# Altium PCB smarchWatch_V5.PcbDoc
Units mm, origin at the board's own origin, x right, y up, seen from the top; angles counter-clockwise.
Board outline 33 x 30 mm, 4 copper layers (Top Layer, Signal Layer 1, Signal Layer 2, Bottom Layer), stack 0.82 mm thick; 54 components, 70 nets, 249 pads, 128 vias.
Unrouted connection lines stored in the file: 1.
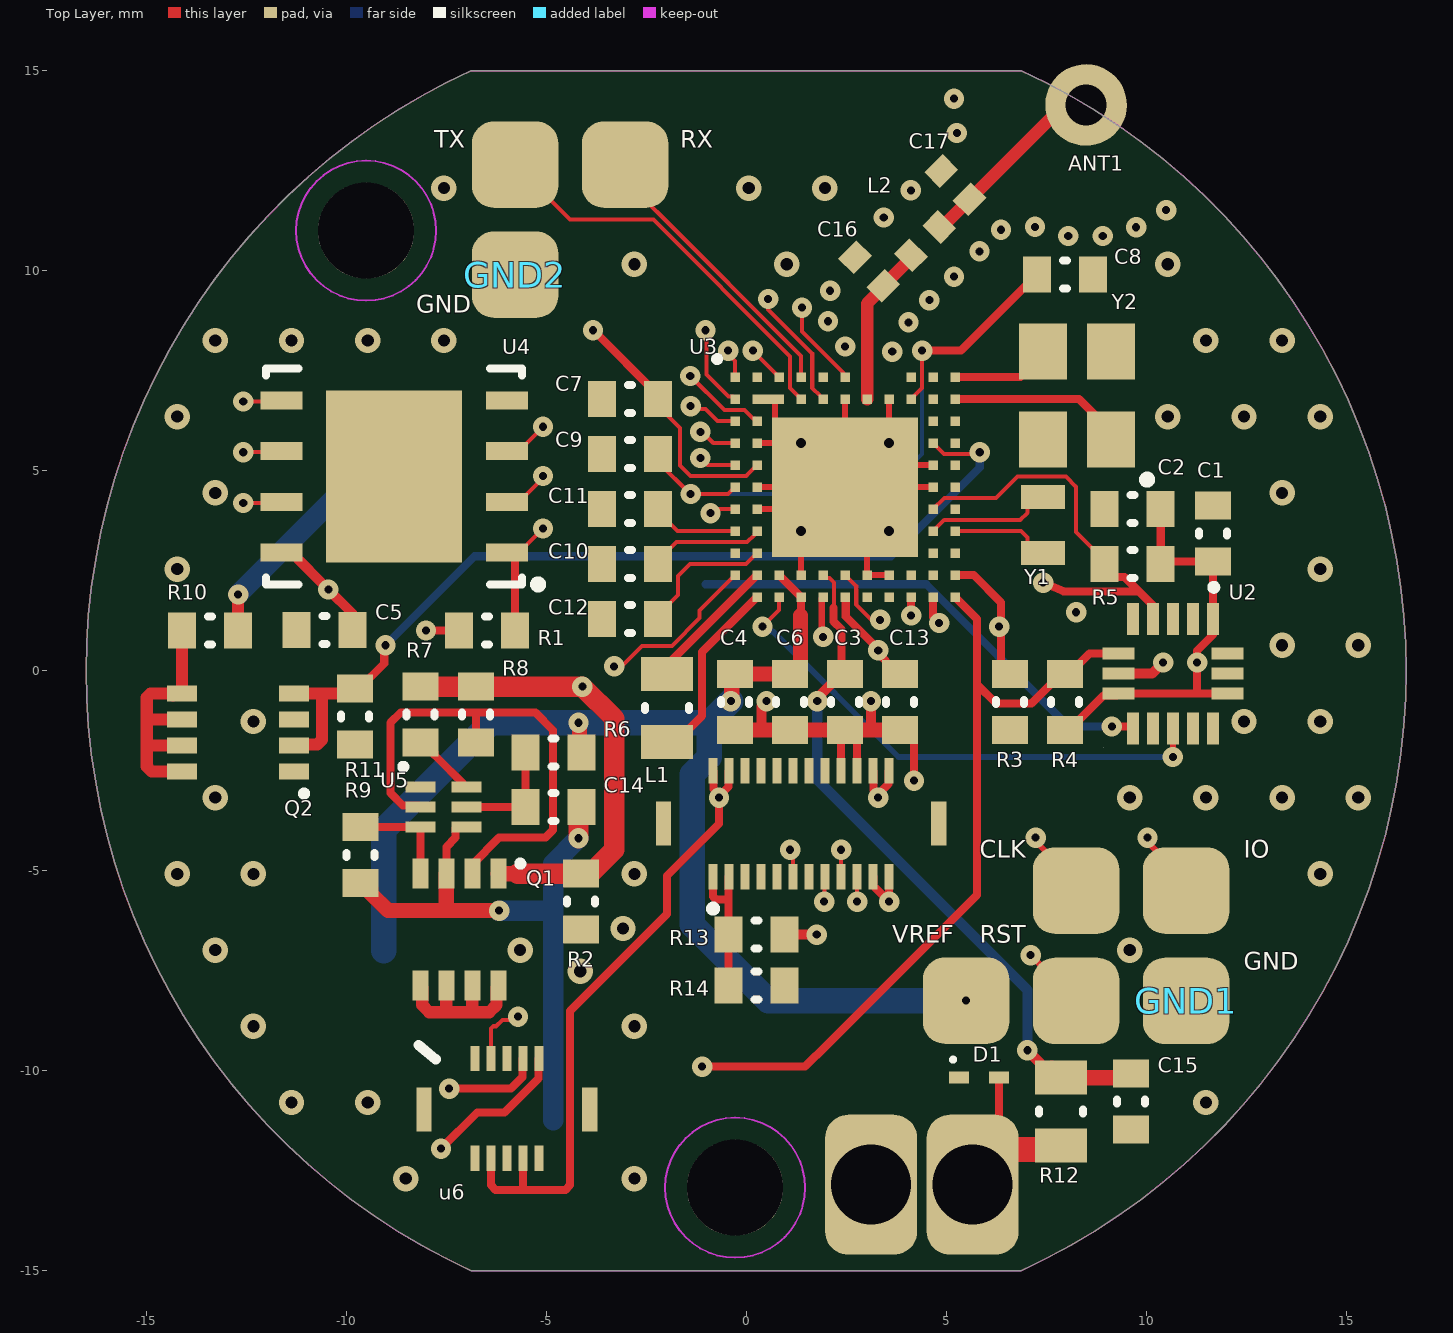
[diagram p0: Top Layer view]
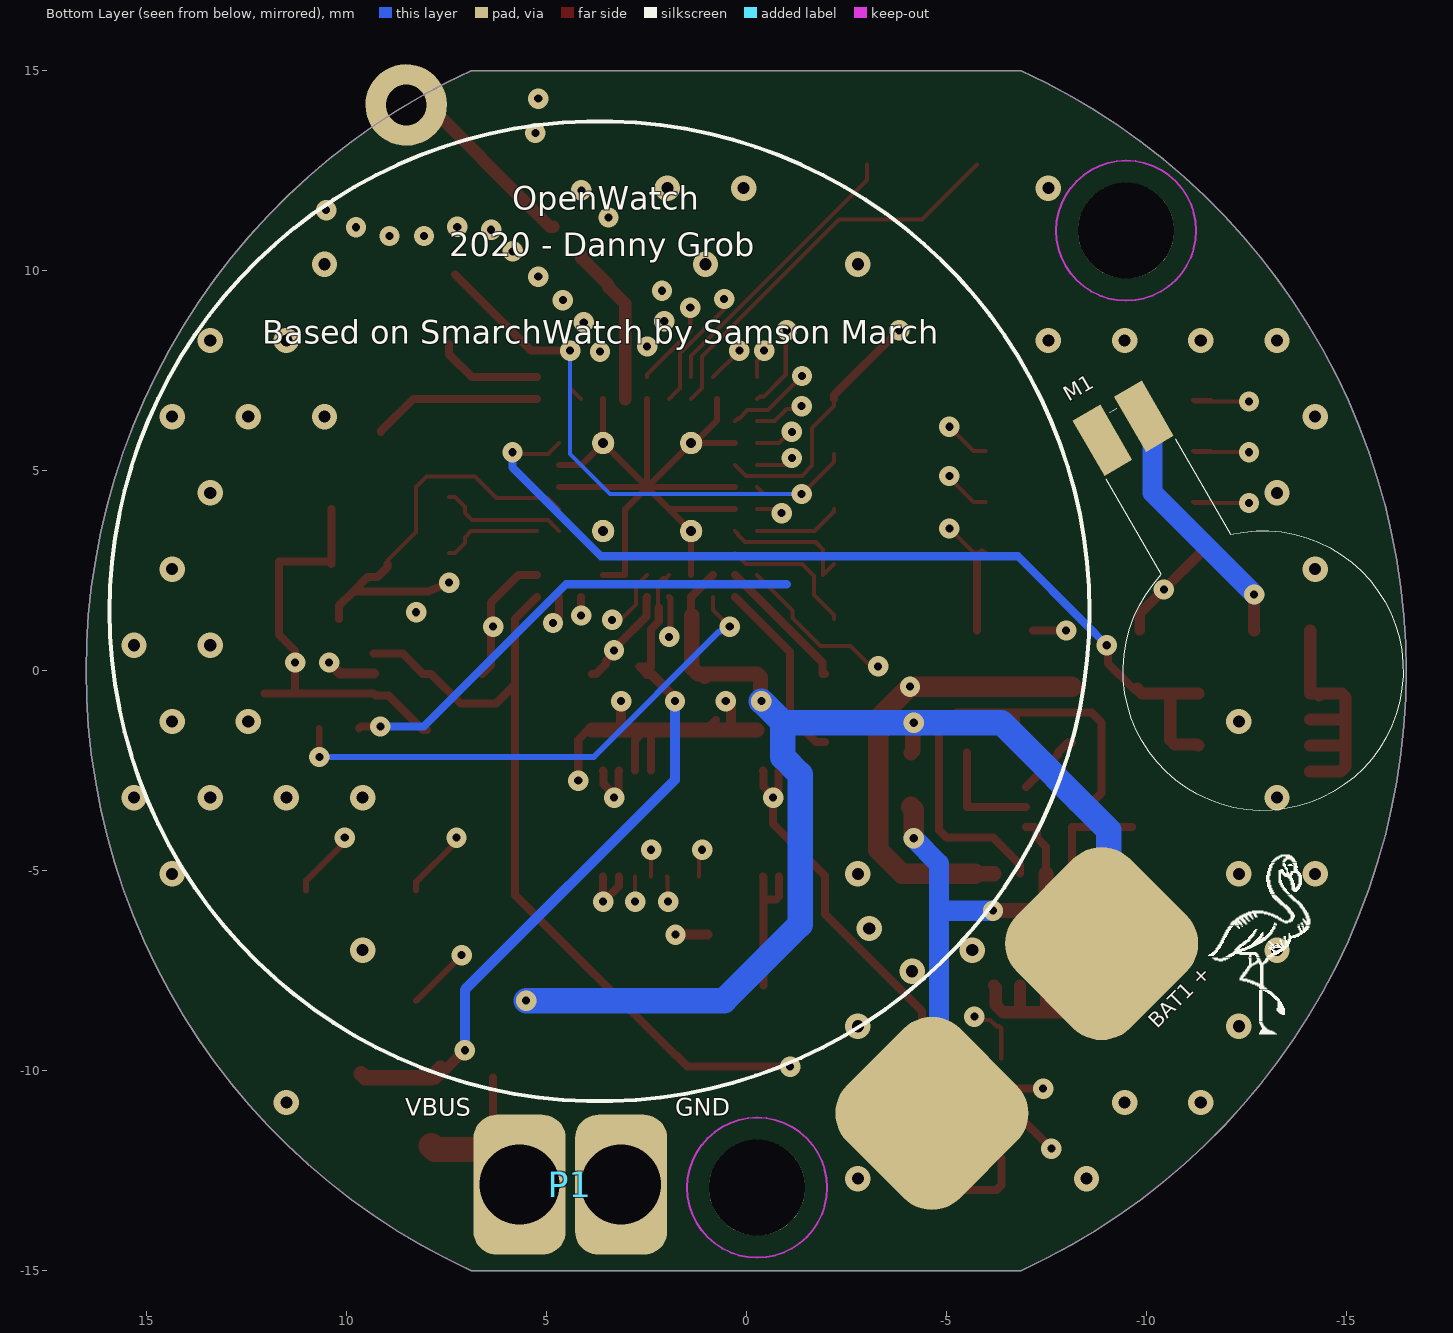
[diagram p1: Bottom Layer view, seen from below]
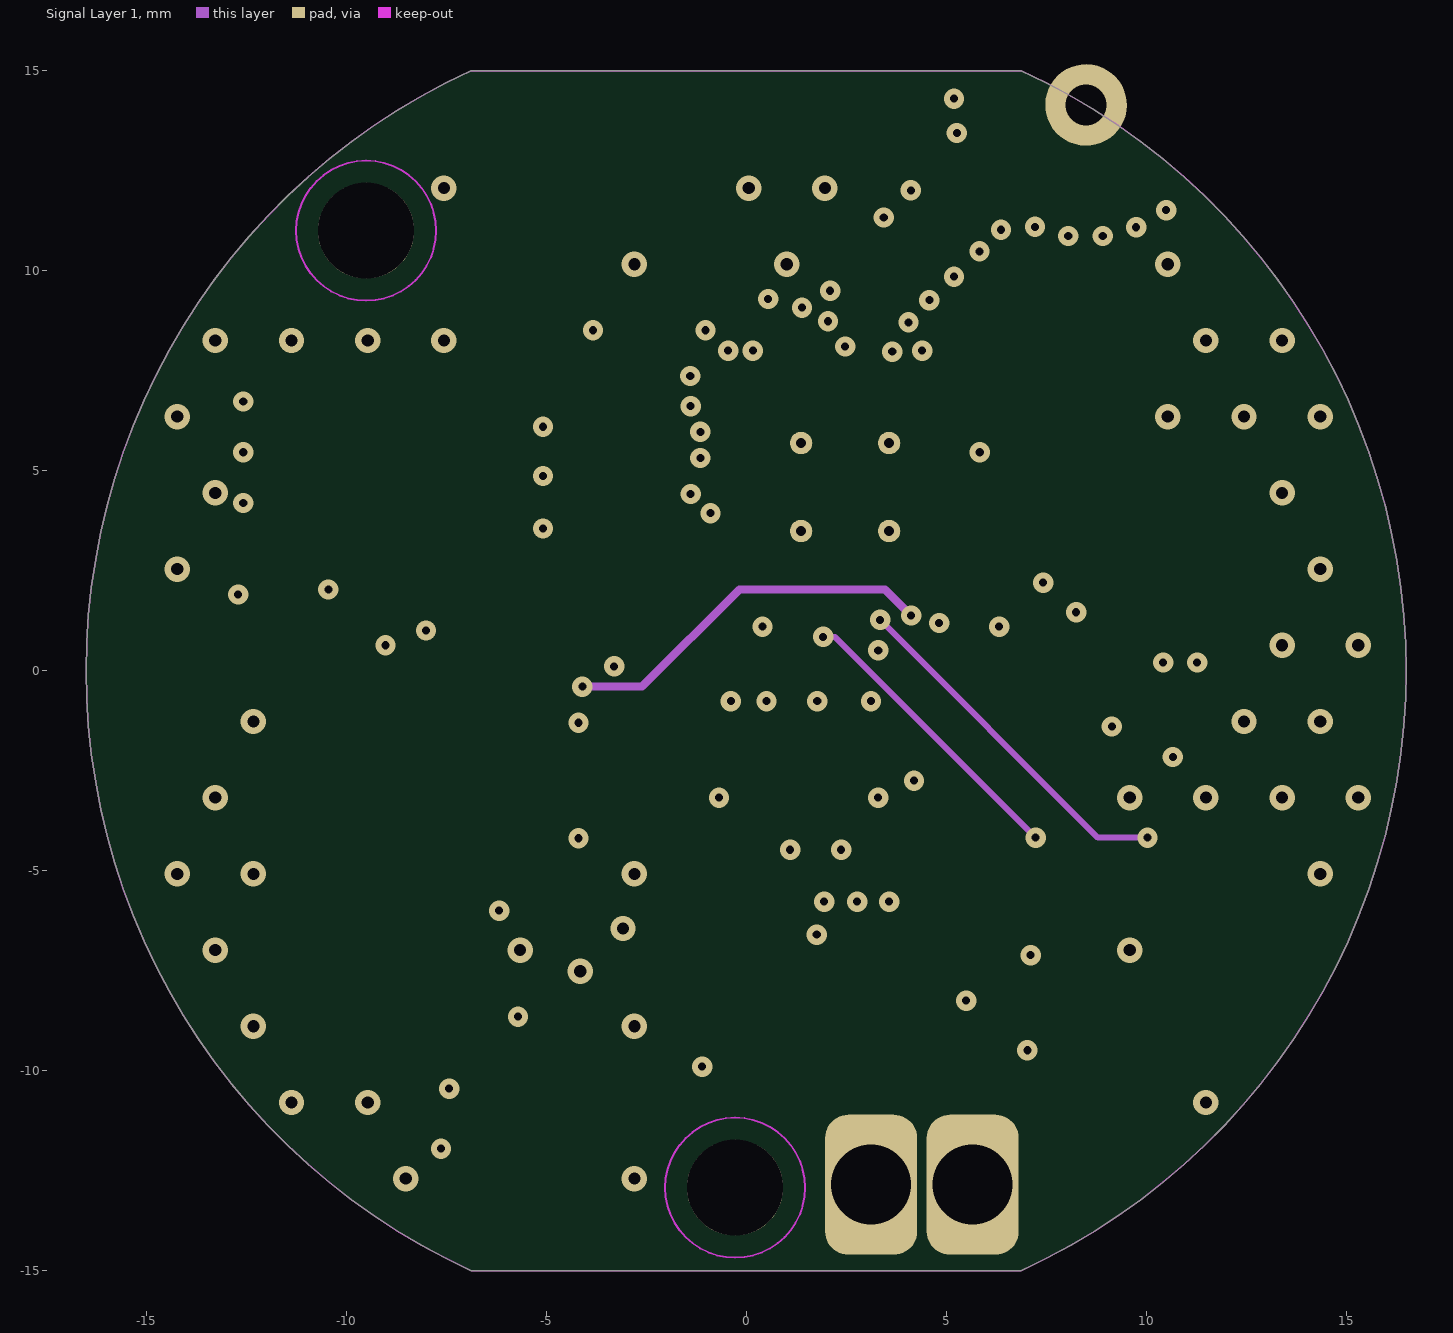
[diagram p2: Signal Layer 1]
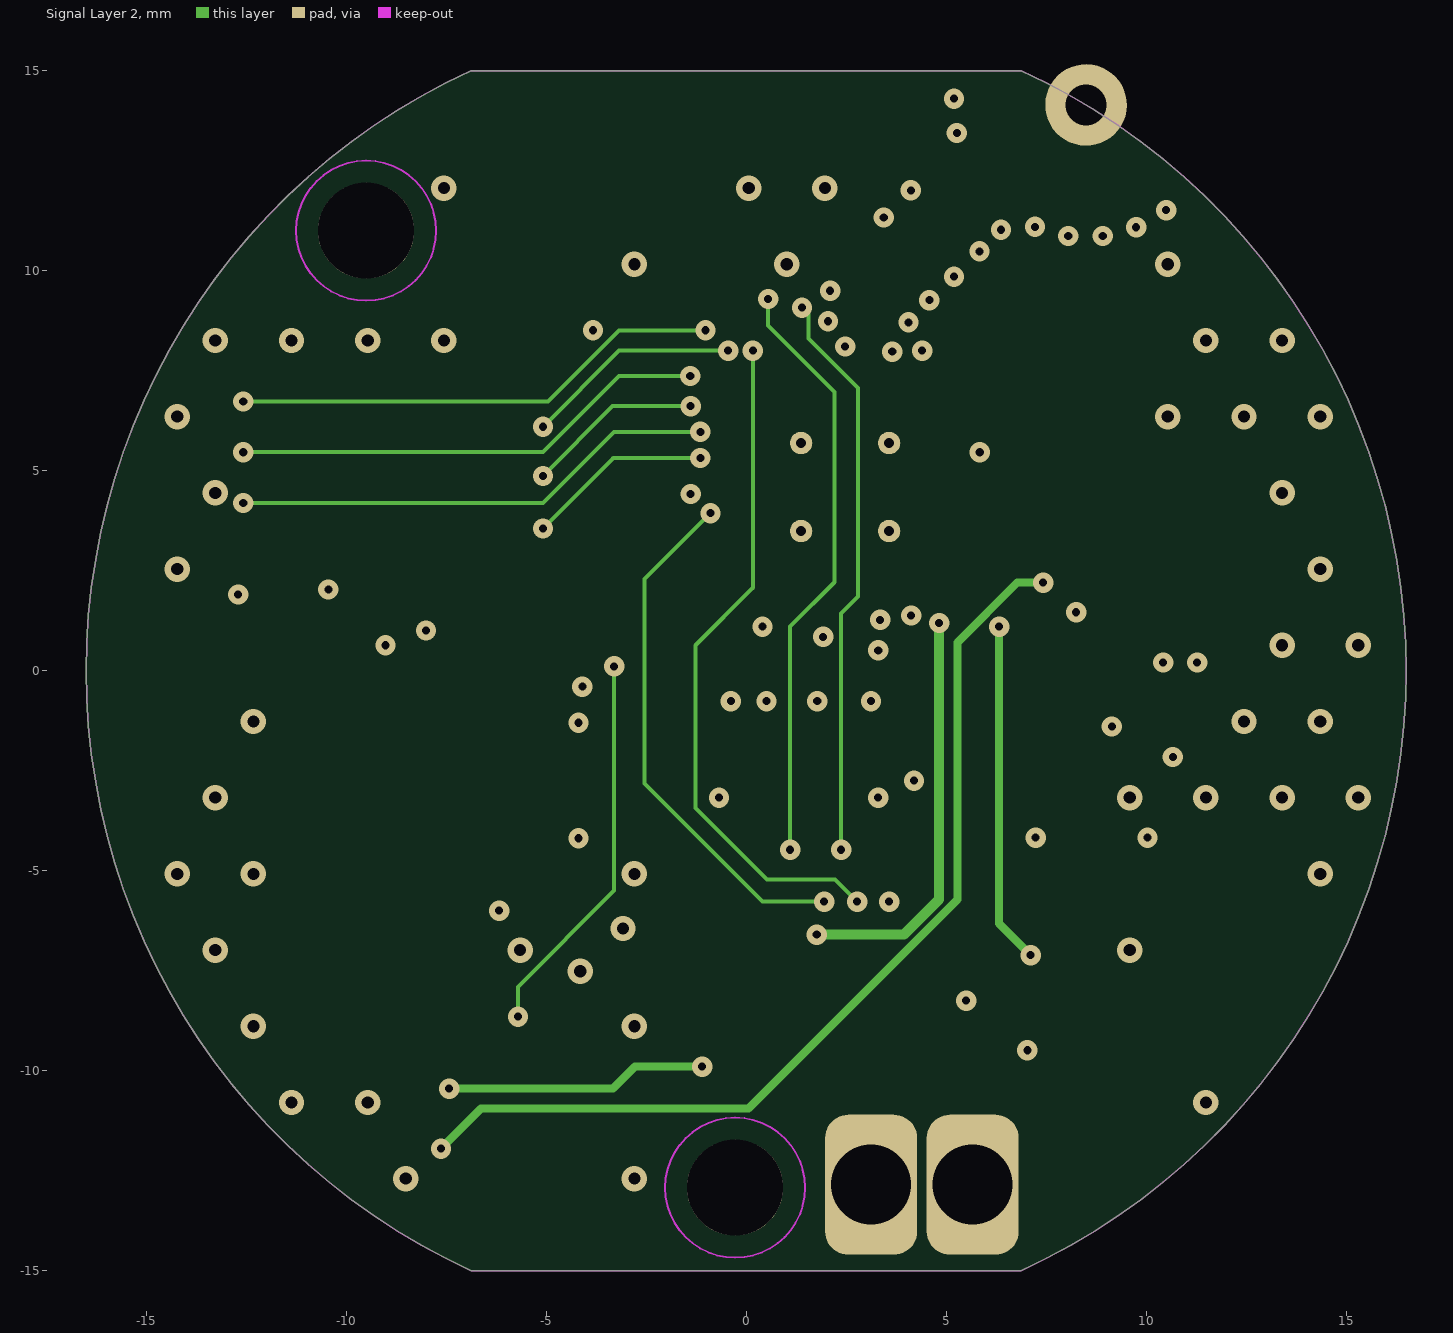
[diagram p3: Signal Layer 2]
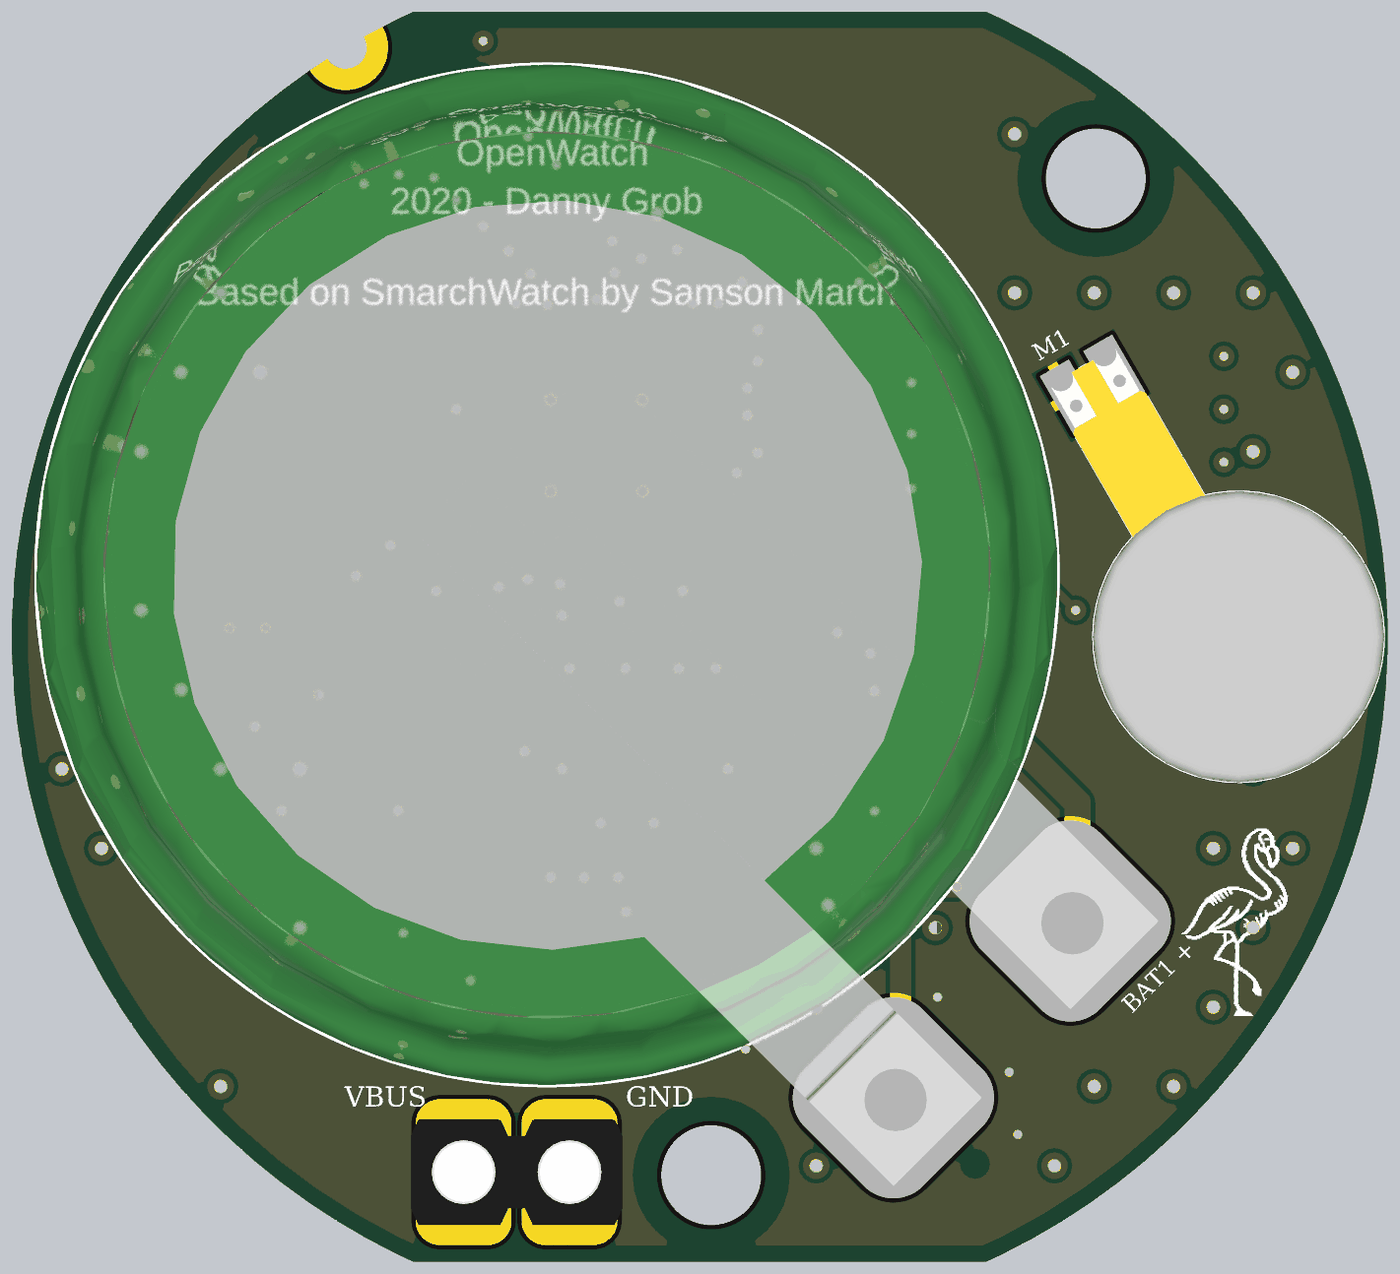
[diagram p4: 3D render of the assembled board from below, using the file's embedded part models]

## Layer stack, top to bottom
Top Solder: solder mask 0.01, Solder Resist, Dk 3.5
Top Layer: signal copper 0.035
Dielectric 1: core 0.175, FR-4, Dk 4.29
Signal Layer 1: signal copper 0.035
Dielectric 3: prepreg 0.33, Dk 3.96
Signal Layer 2: signal copper 0.035
Dielectric 2: core 0.175, Dk 4.29
Bottom Layer: signal copper 0.035
Bottom Solder: solder mask 0.01, Solder Resist, Dk 3.5

## Board outline
-6.875,-15 cw(c0,0) -6.875,15 6.875,15 cw(c0,0) 6.875,-15

## Design rules (kind name [scope] priority, off if disabled: settings)
BoardOutlineClearance BoardOutlineClearance_SILK [OnLayer('Bottom Overlay') or OnLayer('Top Overlay')] p1: gap=0 ignorepadtopadclearanceinfootprint=FALSE
BoardOutlineClearance BoardOutlineClearance_Castellated [(InComponent('CH_GND') OR InComponent('CH_VIN') OR InNet('5V')) OR InComponent('TX') OR InComponent('RX') OR (IsTrack AND InNet('TX')) OR (IsTrack AND InNet('RX')) OR InComponent('VBAT') OR InComponent('GND') OR (IsTrack AND InNet('VBAT')) OR InComponent('ANT1') OR (IsTrack AND InNet('ANT'))] p2: gap=0 ignorepadtopadclearanceinfootprint=FALSE
BoardOutlineClearance BoardOutlineClearance_TOUCH [InNamedPolygon('TOUCH_6') or  InNamedPolygon('TOUCH_7') or  InNamedPolygon('TOUCH_8') or  InNamedPolygon('TOUCH_8') or  InNamedPolygon('TOUCH_SOLDER_6') or  InNamedPolygon('TOUCH_SOLDER_7') or  InNamedPolygon('TOUCH_SOLDER_8') or  InNamedPolygon('TOUCH_SOLDER_8') or InComponent('CT_1') or  InComponent('CT_2') or   InComponent('CT_3') or   InComponent('CT_4')] p3: gap=0 ignorepadtopadclearanceinfootprint=FALSE
BoardOutlineClearance [All] p4: gap=0.381 ignorepadtopadclearanceinfootprint=FALSE
Clearance Clearance_Castellated [(InComponent('CH_GND') OR InComponent('CH_VIN') OR InNet('5V')) OR InComponent('TX') OR InComponent('RX') OR (IsTrack AND InNet('TX')) OR (IsTrack AND InNet('RX')) OR InComponent('VBAT') OR InComponent('GND') OR (IsTrack AND InNet('VBAT')) OR InComponent('ANT1') OR (IsTrack AND InNet('ANT')) vs IsKeepOut] p1: gap=0 ignorepadtopadclearanceinfootprint=FALSE
Clearance Clearance_ANT [InComponent('ANT1')] p2: gap=2 ignorepadtopadclearanceinfootprint=FALSE
Clearance [All] p3: gap=0.102 ignorepadtopadclearanceinfootprint=FALSE
ComponentClearance [All] p1: gap=0 collisioncheckmode=3 verticalgap=0 showdistances=FALSE
MinimumSolderMaskSliver [All] p1: minsoldermaskwidth=0
PolygonConnect PolygonConnect_CHARGE [InComponent('CH_GND') OR InComponent('CH_VIN') OR InComponent('GND')] p1: connectstyle=Direct reliefconductorwidth=0.254 reliefentries=4 polygonreliefangle="90 Angle" airgapwidth=0.254
PolygonConnect PolygonConnect_TOUCH [InNet('TOUCH_6') or InNet('TOUCH_7') or  InNet('TOUCH_8') or  InNet('TOUCH_9')] p2: connectstyle=Direct reliefconductorwidth=0.254 reliefentries=4 polygonreliefangle="90 Angle" airgapwidth=0.254
PolygonConnect PolygonConnect_VIA [IsVia] p3: connectstyle=Direct reliefconductorwidth=0.254 reliefentries=4 polygonreliefangle="90 Angle" airgapwidth=0.254
PolygonConnect [All] p4: connectstyle=Relief reliefconductorwidth=0.254 reliefentries=4 polygonreliefangle="90 Angle" airgapwidth=0.152
RoutingVias [All] p1: holewidth=0.711 width=1.27 viastyle="Through Hole" minholewidth=0.203 minwidth=0.508 maxholewidth=127 maxwidth=127
SilkToSilkClearance [All] p1: silktosilkclearance=0
SilkToSolderMaskClearance [IsPad] p1: minsilkscreentomaskgap=0 clearancetoexposedcopper=TRUE
SolderMaskExpansion [All] p1: expansion=0.102 istentingtop=FALSE
Width [All] p1: maxlimit=25.4 minlimit=0.102 preferedwidth=0.203
26 further rules are at their usual default settings.

## Classes and differential pairs
component class BLE: ANT1 C3 C4 C5 C6 C7 C8 C9 C10 C11 C12 C13 C16 C17 CLK GND1 GND2 IO L1 L2 R1 R2 R3 RST RX TX U3 U4 Y1 Y2
component class Actuators: M1 Q2 R10 R11 R13 R14 u6
component class Sensors: C1 C2 R4 R5 U2
component class Power: "BAT1 +" C14 C15 D1 P1 Q1 R6 R7 R8 R9 R12 U5

## Components (designator, comment, footprint, x,y, rotation, side; value= is the part's Value field where it differs from the comment)
ANT1 "0.1\" Header" "0.1\" Header" 8.498,14.143 r59 top
"BAT1 +" "RJD2430C1ST1" RJD2430C1ST1 3.664,1.485 r315 bottom (schematic designator BAT1)
C1 "100nF" CAP_0603_HIGH 11.675,3.425 r90 top
C2 "10uF" CAP_0603_HIGH 9.665,4.04 r180 top
C3 "4.7uF" CAP_0603_HIGH 2.475,-0.785 r270 top
C4 "1uF" CAP_0603_HIGH -0.275,-0.785 r270 top
C5 "100nF" CAP_0603_HIGH -10.541,1.016 r180 top
C6 "1uF" CAP_0603_HIGH 1.1,-0.785 r270 top
C7 "1uF" CAP_0603_HIGH -2.9,6.79 r180 top
C8 "4.7uF" CAP_0603_HIGH 7.975,9.9 r0 top
C9 "4.7uF" CAP_0603_HIGH -2.9,5.415 r180 top
C10 "10uF" CAP_0603_HIGH -2.9,2.665 r180 top
C11 "10uF" CAP_0603_HIGH -2.9,4.04 r180 top
C12 "10uF" CAP_0603_HIGH -2.9,1.29 r180 top
C13 "4.7uF" CAP_0603_HIGH 3.85,-0.785 r270 top
C14 "100nF" CAP_0603_HIGH -4.82,-3.405 r0 top
C15 "10uF" CAP_0603_HIGH 9.625,-10.775 r270 top
C16 "C" CAP_0402_MEDIUM 3.075,9.979 r315 top
C17 "C" CAP_0402_MEDIUM 5.233,12.136 r315 top
CLK "0.1\" Pad" "0.1\" Pad" 8.25,-5.5 r0 top
D1 "ESD9B5.0ST5G" ESD9B5.0ST5G 5.823,-10.175 r0 top
GND1 "0.1\" Pad" "0.1\" Pad" 11,-8.255 r0 top
GND2 "0.1\" Pad" "0.1\" Pad" -5.775,9.9 r0 top
IO "0.1\" Pad" "0.1\" Pad" 11,-5.5 r0 top
L1 "CKP2012NR47M-T" IND_0805_HIGH -1.975,-0.935 r270 top value=470nF
L2 "L" IND_0402_MEDIUM 4.473,10.739 r225 top
M1 "C0720B001F" C0720B001F -12.925,0 r150 bottom
P1 "800-10-002-30-507101" 800-10-002-30-507101 4.394,-12.852 r180 bottom
Q1 "ECH8693R-TL-W" ECH8693R-TL-W -7.17,-6.475 r270 top
Q2 "ECH8693R-TL-W" ECH8693R-TL-W -12.703,-1.55 r180 top
R1 "10K" RES_0603_HIGH -6.475,1.005 r180 top
R2 "0.1Ohm" RES_0603_HIGH -4.125,-5.775 r90 top
R3 "10K" RES_0603_HIGH 6.6,-0.785 r90 top
R4 "10K" RES_0603_HIGH 7.975,-0.785 r270 top
R5 "10K" RES_0603_HIGH 9.665,2.665 r0 top
R6 "330" RES_0603_HIGH -4.82,-2.05 r180 top
R7 "2.2K" RES_0603_HIGH -8.145,-1.1 r90 top
R8 "5.1M" RES_0603_HIGH -6.75,-1.1 r90 top
R9 "5.1M" RES_0603_HIGH -9.645,-4.605 r90 top
R10 "330" RES_0603_HIGH -13.403,1.005 r0 top
R11 "10K" RES_0603_HIGH -9.779,-1.151 r90 top
R12 "0.39 Ohm" RES_0805_HIGH 7.875,-11.025 r90 top
R13 "0 Ohm" RES_0603_HIGH 0.263,-6.6 r180 top
R14 "0 Ohm" RES_0603_HIGH 0.263,-7.875 r0 top
RST "0.1\" Pad" "0.1\" Pad" 8.25,-8.255 r0 top
RX "0.1\" Pad" "0.1\" Pad" -3.025,12.65 r0 top
TX "0.1\" Pad" "0.1\" Pad" -5.775,12.65 r0 top
U2 "LIS3DH" LIS3DH 10.675,-0.075 r270 top
U3 "DA14683" DA14683 2.475,4.59 r0 top
U4 "W25Q128JVPIQ" W25Q128JVPIQ -8.8,4.855 r180 top
U5 "BQ29700DSER" BQ29700DSER -7.57,-3.405 r0 top
u6 "DF37NB-10DS-0.4V" DF37NB-10DS-0.4V -5.98,-11.875 r0 top (schematic designator X?)
Y1 "9HT11-32.768KDZB-T" 9HT11-32.768KDZB-T 7.425,2.94 r90 top
Y2 "7M-16.000MEEQ-T" 7M-16.000MEEQ-T 9.125,5.775 r90 top

## Footprints (in the part's own frame and the unit in brackets; to place one, negate y for a bottom-side part, rotate by r counter-clockwise, add the part's x,y. Pads: shape width x height; smd on the part's side, far side on the other; paste and mask are expansions set on the pad)
"0.1\" Header" [mm] "0.1\" Header"
  round 2.04 hole 1.02: 1(0,0)
"0.1\" Pad" [mil] "0.1\" Pad"
  rrect50% 85x85 smd paste-85: 1(0,0)
7M-16.000MEEQ-T [mm] "16MHz ±10ppm Crystal 10pF 80 Ohms 4-SMD, No Lead"
  rect 1.4x1.2 smd: 1(0,0) 2(2.2,0) 3(2.2,1.7) 4(0,1.7)
  silkscreen extent -1.1,-1 -0.9,-0.8, body extent -0.7,-0.4 2.9,2.1, height 0.7
9HT11-32.768KDZB-T [mm] "32.768kHz ±20ppm Crystal 6pF 90 kOhms 2-SMD, No Lead"
  rect 0.6x1.1 smd: 1(0,0) 2(1.4,0)
  body extent -0.3,-0.6 1.7,0.6, height 0.6
800-10-002-30-507101 [mm] "2 Position Spring Mating Target Connector Surface Mount"
  rrect50% 2.3x3.5 hole 2: 1(-1.27,0) 2(1.27,0)
  body extent -2.54,-1.27 2.54,1.27, height 4
BQ29700DSER [mm] "Battery Battery Protection IC Lithium-Ion/Polymer 6-WSON (1.5x1.5)"
  rect 0.75x0.28 smd: 1(-0.575,0.5) 2(-0.575,0) 3(-0.575,-0.5) 4(0.575,-0.5) 5(0.575,0) 6(0.575,0.5)
  silkscreen extent -1.05,0.95 -0.95,1.05, body extent -0.78,-0.77 0.78,0.77, height 0.8
C0720B001F [mm] "DC Motor Vibration, ERM 10000 RPM  3VDC"
  rect 0.8x1.6 smd: 1(-0.6,7) 2(0.6,7)
  silkscreen extent -3.5,-3.5 3.5,7.5, body extent -3.5,-3.5 3.5,7.5, height 2.1
CAP_0402_MEDIUM [mm] "Medium density 0402 passive"
  rect 0.55x0.65 smd: 1(-0.5,0) 2(0.5,0)
  body extent -0.52,-0.27 0.53,0.28, height 0.4
CAP_0603_HIGH [mm] "High density 0603 passive"
  rect 0.7x0.9 smd: 1(-0.7,0) 2(0.7,0)
  silkscreen extent -0.05,-0.35 0.05,0.35, body extent -0.85,-0.47 0.85,0.47, height 0.6
DA14683 [mm] "SmartBond DA14683 Single-chip high-security Bluetooth 5 solution with expandable memory"
  rect 0.24x0.24 smd paste-0.025: A1(-2.75,2.75) A2(-2.75,2.2) A3(-2.75,1.65) A4(-2.75,1.1) A5(-2.75,0.55) A6(-2.75,0) A7(-2.75,-0.55) A8(-2.75,-1.1) A9(-2.75,-1.65) A10(-2.75,-2.2) A11(-2.2,-2.75) A12(-1.65,-2.75) A13(-1.1,-2.75) A14(-0.55,-2.75) A15(0,-2.75) A16(0.55,-2.75) A17(1.1,-2.75) A18(1.65,-2.75) A19(2.2,-2.75) A20(2.75,-2.75) A21(2.75,-2.2) A22(2.75,-1.65) A23(2.75,-1.1) A24(2.75,-0.55) A25(2.75,0) A26(2.75,0.55) A27(2.75,1.1) A28(2.75,1.65) A29(2.75,2.2) A30(2.75,2.75) A31(2.2,2.75) A32(1.65,2.75) A33(0,2.75) A34(-0.55,2.75) A35(-1.1,2.75) A36(-1.65,2.75) A37(-2.2,2.75) B1(-2.2,1.65) B2(-2.2,0.55) B3(-2.2,-1.1) B4(-2.2,-1.65) B5(-2.2,-2.2) B6(-1.65,-2.2) B7(-0.55,-2.2) B8(0,-2.2) B9(1.1,-2.2) B10(1.65,-2.2) B11(2.2,-2.2) B12(2.2,-1.65) B13(2.2,-1.1) B14(2.2,-0.55) B15(2.2,1.1) B16(2.2,1.65) B17(2.2,2.2) B18(1.65,2.2) B19(1.1,2.2) B20(0.55,2.2) B21(0,2.2) B22(-0.55,2.2) B23(-1.1,2.2) GND(-2.2,-0.55) GND(-2.2,0) GND(-2.2,1.1) GND(-1.1,-2.2) GND(0.55,-2.2) GND(2.2,0) GND(2.2,0.55)
  rect 0.79x0.24 smd paste-0.025: GND(-1.925,2.2)
  round 0.559 hole 0.254 mask+0.102: GND(-1.1,-1.1) GND(-1.1,1.1) GND(1.1,-1.1) GND(1.1,1.1)
  rect 3.65x3.485 smd paste-1 mask+0: GND(0,0)
  silkscreen extent -3.27,3.13 -3.13,3.27, body extent -3,-3 3,3, height 0.85
DF37NB-10DS-0.4V [mm]
  rect 0.23x0.63 smd: 1(-0.8,2.177) 2(-0.4,2.177) 3(0,2.177) 4(0.4,2.177) 5(0.8,2.177) 6(0.8,-0.315) 7(0.4,-0.315) 8(0,-0.315) 9(-0.4,-0.315) 10(-0.8,-0.315)
  rect 0.38x1.1 smd: MNT(-2.07,0.904) MNT(2.07,0.904)
  silkscreen extent -2.21,2.16 -1.78,2.51, body extent -2.11,-0.58 2.11,2.4, height 2.71
ECH8693R-TL-W [mm] "Mosfet Array 2 N-Channel (Dual) Common Drain 24V 14A 1.4W Surface Mount SOT-28FL/ECH8"
  rect 0.75x0.4 smd: 1(-1.4,0.975) 2(-1.4,0.325) 3(-1.4,-0.325) 4(-1.4,-0.975) 5(1.4,-0.975) 6(1.4,-0.325) 7(1.4,0.325) 8(1.4,0.975)
  silkscreen extent -1.7,1.47 -1.6,1.57, body extent -1.18,-1.48 1.18,1.48, height 0.95
ESD9B5.0ST5G [mm] "TVS DIODE 5V SOD923"
  rect 0.5x0.3 smd: 1(-0.5,0) 2(0.5,0)
  silkscreen extent -0.7,0.4 -0.6,0.5, body extent -0.5,-0.33 0.5,0.33, height 0.4
IND_0402_MEDIUM [mm] "Medium density 0402 passive"
  rect 0.55x0.65 smd: 1(-0.5,0) 2(0.5,0)
  body extent -0.52,-0.27 0.53,0.28, height 0.4
IND_0805_HIGH [mm] "High density 0805 passive"
  rect 0.85x1.3 smd: 1(-0.85,0) 2(0.85,0)
  silkscreen extent -0.05,-0.55 0.05,0.55, body extent -1.1,-0.67 1.1,0.68, height 0.7
LIS3DH [mm] "LIS3DH Accelerometer X, Y, Z Axis ±2g, 4g, 8g, 16g 0.5Hz ~ 625Hz 16-LGA (3x3)"
  rect 0.8x0.3 smd: 1(-1.365,1) 2(-1.365,0.5) 3(-1.365,0) 4(-1.365,-0.5) 5(-1.365,-1) 9(1.365,-1) 10(1.365,-0.5) 11(1.365,0) 12(1.365,0.5) 13(1.365,1)
  rect 0.3x0.8 smd: 6(-0.5,-1.365) 7(0,-1.365) 8(0.5,-1.365) 14(0.5,1.365) 15(0,1.365) 16(-0.5,1.365)
  silkscreen extent -2.23,0.94 -2.08,1.09, body extent -1.5,-1.5 1.5,1.5, height 1
RES_0603_HIGH [mm] "High density 0603 passive"
  rect 0.7x0.9 smd: 1(-0.7,0) 2(0.7,0)
  silkscreen extent -0.05,-0.35 0.05,0.35, body extent -0.85,-0.47 0.85,0.47, height 0.6
RES_0805_HIGH [mm] "High density 0805 passive"
  rect 0.85x1.3 smd: 1(-0.85,0) 2(0.85,0)
  silkscreen extent -0.05,-0.55 0.05,0.55, body extent -1.1,-0.67 1.1,0.68, height 0.7
RJD2430C1ST1 [mm] "Coin, 24.5mm 3.7V Lithium-Ion Battery Rechargeable (Secondary) 110mAh"
  rrect50% 4x4 smd: 1(-3,14.75) 2(3,14.75)
  silkscreen extent -12.25,-12.25 12.25,12.25, body extent -12.25,-12.25 12.25,16.25, height 3.35
W25Q128JVPIQ [mm] "FLASH - NOR Memory IC 128Mb (16M x 8) SPI - Quad I/O, QPI, DTR 133MHz 8-WSON (6x5)"
  rect 1.05x0.45 smd: 1(-2.82,1.905) 2(-2.82,0.635) 3(-2.82,-0.635) 4(-2.82,-1.905) 5(2.82,-1.905) 6(2.82,-0.635) 7(2.82,0.635) 8(2.82,1.905)
  rect 3.4x4.3 smd paste-1.7: 4(0,0)
  silkscreen extent -3.7,-2.7 3.2,2.8, body extent -3.05,-2.55 3.05,2.55, height 0.8

## Part data
"BAT1 +": "Coin, 24.5mm 3.7V Lithium-Ion Battery Rechargeable (Secondary) 110mAh"
C1 C2 C3 C4 C5 C6 C7 C8 C9 C10 C11 C12 C13 C14 C15: library part Capacitor_0603, "0603 Capacitor"
C16 C17: library part Capacitor_0402, "0402 Capacitor"
D1: "TVS DIODE 5V SOD923"
L1: library part Inductor_0805, "Inductor_0805", Parameter 1=CKP2012, Parameter 2=NR47M-T
L2: library part Inductor_0402, "Inductor_0402"
M1: "DC Motor Vibration, ERM 10000 RPM 3VDC"
P1: "2 Position Spring Mating Target Connector Surface Mount"
Q1 Q2: "Mosfet Array 2 N-Channel (Dual) Common Drain 24V 14A 1.4W Surface Mount SOT-28FL/ECH8"
R1 R2 R3 R4 R5 R6 R7 R8 R9 R10 R11 R13 R14: library part Resistor_0603, "0603 Resistor"
R12: library part Resistor_0805, "0805 Resistor"
U2: "LIS3DH ACCEL 2-16G I2C/SPI 16LGA"
U3: "SmartBond DA14683 Single-chip high-security Bluetooth 5 solution with expandable memory"
U4: "FLASH - NOR Memory IC 128Mb (16M x 8) SPI - Quad I/O, QPI, DTR 133MHz  8-WSON (6x5)"
U5: "Battery Battery Protection IC Lithium-Ion/Polymer 6-WSON (1.5x1.5)"
Y1: "32.768kHz ±20ppm Crystal 6pF 90 kOhms 2-SMD, No Lead", Parameter 1=9HT11, Parameter 2=-32.76, Parameter 3=8KDZ, Parameter 4=B-T
Y2: "16MHz ±10ppm Crystal 10pF 80 Ohms 4-SMD, No Lead", Parameter 1=7M-16, Parameter 2=.000M, Parameter 3=EEQ-T

## Free pads (board coordinates)
  round 2.4 hole 2.4 unplated: 0(-9.5,11) 0(-0.275,-12.925)
  rect 0.38x1.1 smd: 0(-2.065,-3.825) 0(4.815,-3.825)
  rect 0.23x0.63 smd: 1(-0.825,-5.15) 2(-0.425,-5.15) 3(-0.025,-5.15) 4(0.375,-5.15) 5(0.775,-5.15) 6(1.175,-5.15) 7(1.575,-5.15) 8(1.975,-5.15) 9(2.375,-5.15) 10(2.775,-5.15) 11(3.175,-5.15) 12(3.575,-5.15) 13(3.575,-2.5) 14(3.175,-2.5) 15(2.775,-2.5) 16(2.375,-2.5) 17(1.975,-2.5) 18(1.575,-2.5) 19(1.175,-2.5) 20(0.775,-2.5) 21(0.375,-2.5) 22(-0.025,-2.5) 23(-0.425,-2.5) 24(-0.825,-2.5)
  rrect50% 2.159x2.159 smd: 2(5.5,-8.25)

## Via types
v1: diameter 0.508, hole 0.203, Top Layer to Bottom Layer, tented both sides, 82 vias
v2: diameter 0.635, hole 0.305, Top Layer to Bottom Layer, tented both sides, 46 vias

## Nets (pads, with @x,y where several pads share a name; then routed paths per layer and width w, separated by ;. In a path a pad name is that pad's centre, name@x,y a point inside that pad or via, vN(x,y) a via of type N, cw(c..) or ccw(c..) an arc to the next point about the centre after c; other vN are vias at no path point)
1V2: C10.1 U3.B3 | length 3.4
  Top Layer w0.102: C10.1 -1.925,2.39 -1.925,3.028 -1.741,3.212 0.023,3.212 0.206,3.395 0.206,3.421 U3.B3
1V4: C8.1 C9.1 U3.A6 U3.B18 | length 16.3
  Top Layer w0.102: C9.1 -2.2,5.219 -1.397,4.416 v1(-1.387,4.416) -0.449,4.416 U3.A6 ; U3.B18 4.4,7.065 v1(4.4,8.001)
  Top Layer w0.203: v1(4.4,8.001) 5.376,8.001 C8.1
  Bottom Layer w0.102: v1(-1.387,4.416) 3.4,4.416 4.4,5.416 v1(4.4,8.001)
1V8: C11.1 U3.A8 | length 2.2
  Top Layer w0.102: C11.1 -2.2,3.978 -1.712,3.49 U3.A8
1V8P: C12.1 U3.B4 | length 3.5
  Top Layer w0.102: C12.1 -2.2,1.39 -1.698,1.892 -1.698,2.366 -1.399,2.665 0,2.665 U3.B4
3V3: C1.1 C2.1 C5.1 C7.1 C13.1 M1.1 pad.11 pad.12 pad.13 pad.14 pad.23 pad.24 R1.2 R4.2 R5.2 U2.1 U2.8 U2.14 U3.A15 U3.B2 U4.8 u6.7 u6.9 | length 42.1
  Top Layer w0.102: C7.1 -2.2,6.612 -1.65,6.062 -1.65,5.125 -1.393,4.868 0.003,4.868 U3.B2
  Top Layer w0.203: v1(-8.001,1.005) R1.2 ; u6.9 -6.38,-12.862 -6.261,-12.981 -5.58,-12.981 ; u6.7 -5.58,-12.981 ; v1(-3.826,8.509) -3.819,8.509 -2.2,6.89 C7.1 ; pad.24 -0.812,-2.513 -0.812,-2.957 ; pad.23 -0.438,-2.513 -0.438,-2.904 -0.676,-3.141 v1(-0.676,-3.175) -0.676,-3.828 -1.975,-5.127 -1.975,-6.08 -4.4,-8.505 -4.4,-12.862 -4.519,-12.981 -5.58,-12.981 ; U3.A15 2.49,1.825 2.49,1.358 v1@3.162,0.685 ; pad.11 3.18,-5.155 3.18,-5.38 v1(3.575,-5.775) pad.12 ; pad.14 3.188,-2.513 3.188,-2.981 3.3,-3.093 3.562,-2.831 3.562,-2.513 pad.13 ; v1@3.302,0.545 v1(3.302,0.508) 3.302,0.436 3.502,0.237 3.502,0.163 3.75,-0.085 C13.1 ; R4.2 8.075,-1.485 8.937,-0.623 9.262,-0.623 U2.8 11.275,-0.575 ; C2.1 R5.2 10.425,2.725 C1.1 U2.1 11.675,0.897 11.275,0.497 v1(11.275,0.202) 11.275,-0.575 ; U2.14 11.275,-0.575
  Top Layer w0.254: U4.8 -11.363,2.95 v1(-10.443,2.03) -9.841,1.428 C5.1 C5.1@-9.841,1.005
  Bottom Layer w0.508: M1.1@-9.064,5.603 M1.1
  other v1: 3.3,-3.175
16M_N: U3.A30 Y2.3 | length 2.7
  Top Layer w0.203: U3.A30 6.857,7.34 7.425,7.908 Y2.3 Y2.3@7.425,8.165
16M_P: U3.A29 Y2.1 | length 4.3
  Top Layer w0.203: U3.A29 8.323,6.79 9.125,5.988 Y2.1@9.125,5.965
32K_N: U3.B13 Y1.2 | length 3.2
  Top Layer w0.102: U3.B13 4.953,3.768 6.853,3.768 7.032,3.947 7.032,4.091 7.281,4.34 Y1.2
32K_P: U3.A23 Y1.1 | length 2.5
  Top Layer w0.102: U3.A23 6.875,3.49 7.032,3.333 7.032,3.189 7.281,2.94 Y1.1
ANT: ANT1.1 C17.2 L2.1 | length 4.8
  Top Layer w0.312: L2.1 4.897,11.093 C17.2 7.617,13.813 8.21,13.813 ANT1.1@8.383,13.986
B_GND: "BAT1 +.2" C14.2 Q1.3 R9.1 U5.4 | length 15.7
  Top Layer w0.203: Q1.3 -7.495,-4.405 -7.265,-4.175 -7.265,-3.943 -7.226,-3.905 U5.4
  Top Layer w0.381: R9.1 -9.545,-5.305 -9.385,-5.465 -9.385,-5.565 -8.954,-5.996 -7.495,-5.996 ; Q1.3 -7.495,-5.996 ; v1(-6.174,-6) -6.178,-5.996 -7.495,-5.996
  Top Layer w0.508: v1(-4.191,-4.191) -4.191,-3.476 C14.2
  Bottom Layer w0.508: v1(-6.174,-6) -4.822,-6 ; -4.822,-11.243 -4.822,-6 ; v1(-4.191,-4.191) -4.822,-4.822 -4.822,-6
BAT: C14.1 R6.2 U5.5 | length 2.8
  Top Layer w0.203: U5.5 C14.1 R6.2
COUT: Q1.2 R8.1 U5.2 | length 12.9
  Top Layer w0.203: U5.2 -8.183,-3.367 -8.583,-3.367 -8.888,-3.062 -8.888,-1.301 -8.634,-1.047 -6.729,-1.047 ; Q1.2 -6.845,-4.846 -6.174,-4.175 -5.011,-4.175 -4.824,-3.988 -4.824,-1.49 -5.267,-1.047 -6.729,-1.047 ; R8.1 -6.75,-1.068 -6.729,-1.047
DISPLAY_BCKL: R13.1 U3.A19 | length 11.8
  Top Layer w0.203: U3.A19 4.675,1.341 v1(4.826,1.19)
  Top Layer w0.254: R13.1 v1(1.766,-6.6)
  Signal Layer 2 w0.254: v1(1.766,-6.6) 3.941,-6.6 4.826,-5.715 v1(4.826,1.19)
DISPLAY_CLK: pad.8 U3.A7 | length 14.4
  Top Layer w0.102: v1(-0.889,3.937) -0.779,3.937 -0.676,4.04 U3.A7 ; v1(1.95,-5.775) 1.963,-5.763 1.963,-5.162 pad.8
  Signal Layer 2 w0.102: v1(-0.889,3.937) -2.54,2.286 -2.54,-2.825 0.41,-5.775 v1(1.95,-5.775)
DISPLAY_CS: pad.9 U3.A33 | length 17.2
  Top Layer w0.102: v1(1.397,9.075) 1.397,8.483 2.475,7.405 U3.A33 ; pad.9 v1(2.375,-4.476)
  Signal Layer 2 w0.102: v1(1.397,9.075) 1.562,8.91 1.562,8.3 2.8,7.062 2.8,1.857 2.375,1.432 v1(2.375,-4.476)
DISPLAY_MISO: U3.A37
DISPLAY_MOSI: pad.6 U3.B22 | length 18.7
  Top Layer w0.102: v1(0.55,9.289) 0.55,9.033 1.653,7.931 1.653,7.063 U3.B22@1.856,6.86 ; v1(1.1,-4.476) 1.175,-4.551 pad.6 ; U3.B22@1.856,6.859 U3.B22
  Signal Layer 2 w0.102: v1(0.55,9.289) 0.55,8.627 2.21,6.967 2.21,2.21 1.1,1.1 v1(1.1,-4.476)
DISPLAY_RST: pad.10 U3.A36 | length 18.6
  Top Layer w0.102: v1(0.168,8.001) 0.168,7.997 U3.A36 ; v1(2.775,-5.775) pad.10
  Signal Layer 2 w0.102: v1(0.168,8.001) 0.168,2.073 -1.27,0.635 -1.27,-3.429 0.526,-5.225 2.225,-5.225 v1(2.775,-5.775)
DOUT: Q1.4 R9.2 U5.3 | length 2.7
  Top Layer w0.203: R9.2 U5.3 Q1.4
GND: C1.2 C2.2 C3.2 C4.2 C5.2 C6.2 C7.2 C8.2 C9.2 C10.2 C11.2 C12.2 C13.2 C15.2 C16.1 C17.1 D1.1 GND1.1 GND2.1 P1.2 pad.3 pad.4 pad.15 pad.16 Q2.1 Q2.3 R2.1 R3.1 R11.1 R14.2 U2.5 U2.7 U2.10 U2.12 U3.B9 U3.B19 U3.B21 U3.GND U4.4 u6.1 u6.3 u6.6 u6.8 u6.10 u6.MNT Y2.2 Y2.4 | length 32.7
  Top Layer w0.152: U3.GND@0.275,4.04 U3.GND@1.925,4.04 ; U3.GND@0.275,4.59 U3.GND@2.475,4.59 ; U3.GND@0.275,5.69 U3.GND@1.292,5.69 ; U3.GND@0.726,6.79 0.726,6.256 U3.GND@1.292,5.69 ; U3.GND@1.375,2.39 1.375,3.49 U3.GND@1.925,4.04 ; U3.B21 U3.GND@2.475,4.59 ; U3.B9 3.025,2.39 3.025,4.04 U3.GND@2.475,4.59 ; U3.B19 U3.GND@3.575,5.69 ; U3.GND@4.675,4.59 U3.GND@2.475,4.59 ; U3.GND@4.675,5.14 4.125,5.14 U3.GND@3.575,5.69 ; U3.GND@1.292,5.69 1.375,5.69 U3.GND@2.475,4.59 ; U3.GND@1.925,4.04 U3.GND@2.475,4.59 ; U3.GND@2.475,4.59 U3.GND@3.575,5.69
  Top Layer w0.203: C6.2@0.752,-1.237 1,-1.485 C6.2 ; pad.16 2.375,-1.585 C3.2 2.527,-1.485 2.775,-1.733 pad.15 ; C13.2 3.949,-1.485 4.197,-1.733 v1(4.197,-2.75)
  Top Layer w0.254: 0.363,-1.485 0.381,-1.466 0.381,-0.889 v1(0.508,-0.762) ; v1(3.124,-0.762) 3.124,-1.421 3.188,-1.485 ; U2.7 10.148,-0.075 v1(10.425,0.202)
  Top Layer w0.381: C4.2 0.363,-1.485 C6.2@1,-1.485 ; C6.2 C3.2 ; C3.2@2.527,-1.485 3.188,-1.485 C13.2
  other v1: 8.25,1.46 3.653,7.975 2.475,8.102 4.06,8.708 2.046,8.736 4.58,9.264 2.101,9.496 5.196,9.85 5.834,10.483 8.054,10.868 8.917,10.864 6.373,11.021 9.751,11.085 7.222,11.094 3.441,11.327 10.5,11.513 4.119,12.007 5.268,13.44 5.196,14.3
  other v2: -8.509,-12.7 -2.794,-12.7 -11.367,-10.795 -9.461,-10.795 11.493,-10.795 -12.319,-8.89 -2.794,-8.89 -4.148,-7.517 -13.271,-6.985 -5.651,-6.985 9.588,-6.985 -3.077,-6.446 -14.224,-5.08 -12.319,-5.08 -2.794,-5.08 14.351,-5.08 -13.271,-3.175 9.588,-3.175 11.493,-3.175 13.399,-3.175 15.303,-3.175 -12.319,-1.27 12.446,-1.27 14.351,-1.27 13.399,0.635 15.303,0.635 -14.224,2.54 14.351,2.54 -13.271,4.445 13.399,4.445 -14.224,6.35 10.541,6.35 12.446,6.35 14.351,6.35 -13.271,8.255 -11.367,8.255 -9.461,8.255 -7.556,8.255 11.493,8.255 13.399,8.255 -2.794,10.16 1.016,10.16 10.541,10.16 -7.556,12.065 0.064,12.065 1.968,12.065
I2C_SCL: u6.5 | length 31.8
  Top Layer w0.203: v1(-7.63,-11.95) -6.723,-11.043 -6.042,-11.043 -5.193,-10.194 -5.193,-9.711 u6.5 ; v1(7.425,2.2) 7.935,1.983 9.819,1.983 ; 9.464,2.339 9.819,1.983 ; 10.175,1.627 9.819,1.983
  Signal Layer 2 w0.203: v1(-7.63,-11.95) -6.627,-10.947 0.061,-10.947 5.283,-5.725 5.283,0.705 6.778,2.2 v1(7.425,2.2)
I2C_SCL: R5.1 U2.4 U3.B14 | length 7.3
  Top Layer w0.102: U3.B14 4.955,4.32 5.039,4.32 5.042,4.318 6.243,4.318 6.78,4.855 7.992,4.855 8.25,4.597 8.25,3.468 8.965,2.753 R5.1
  Top Layer w0.203: R5.1 8.965,2.587 9.213,2.339 9.464,2.339 ; U2.4 U2.4@10.175,1.627
I2C_SDA: u6.4 | length 9
  Top Layer w0.203: v1(-7.425,-10.45) -5.88,-10.45 -5.593,-10.163 -5.593,-9.711 u6.4
  Signal Layer 2 w0.203: v1(-7.425,-10.45) -3.325,-10.45 -2.775,-9.9 v1(-1.1,-9.9)
I2C_SDA: R4.1 U2.6 U3.A20 | length 20.6
  Top Layer w0.203: -1.1,-9.9 1.467,-9.9 1.742,-9.625 1.76,-9.625 5.775,-5.61 5.775,-0.347 ; U3.A20 5.775,1.29 5.775,-0.347 ; U2.6 8.585,0.425 8.075,-0.085 R4.1 7.875,-0.085 7.135,-0.825 6.253,-0.825 5.775,-0.347
INT_TOUCH: u6.2 | length 11.5
  Top Layer w0.102: u6.2@-6.38,-9.498 u6.2 -6.379,-9.696 -6.379,-8.95 -6.319,-8.89 -6.258,-8.89 -6.096,-8.728 -5.783,-8.728 v1(-5.705,-8.651)
  Signal Layer 2 w0.102: v1(-5.705,-8.651) -5.705,-7.905 -3.3,-5.5 v1(-3.3,0.107)
INT_TOUCH: U3.A10 | length 4.1
  Top Layer w0.102: -3.3,0.107 -3.118,0.107 -2.607,0.618 -1.856,0.618 -1.163,1.311 -1.163,1.502 U3.A10
LED1: U3.B10
LED3: U3.B11
LED_K: pad.1 pad.2@-0.425,-5.15 R13.2 R14.1 | length 3.7
  Top Layer w0.203: pad.1 -0.825,-5.644 -0.752,-5.717 -0.483,-5.717 -0.437,-5.763 ; R14.1 R13.2 -0.437,-5.763 ; pad.2@-0.425,-5.15 -0.437,-5.162 -0.437,-5.763
LX: L1.2 U3.A11 | length 4.7
  Top Layer w0.203: L1.2 -1.75,-1.785 -1.1,-1.135 -1.1,0.465 U3.A11
LY: L1.1 U3.B5 | length 3.4
  Top Layer w0.203: L1.1 -1.913,-0.085 -1.913,0.202 U3.B5
M_D: Q2.5 Q2.6 Q2.7 Q2.8 R10.1 | length 7
  Top Layer w0.305: Q2.8 -14.859,-2.525 -14.986,-2.398 -14.986,-1.834 ; Q2.7 -14.945,-1.875 -14.986,-1.834 ; Q2.6 -14.941,-1.225 -14.986,-1.27 ; R10.1 Q2.5 -14.278,-0.575 -14.326,-0.623 -14.326,-0.575 -14.893,-0.575 -14.986,-0.668 -14.986,-1.27 ; -14.986,-1.834 -14.986,-1.27
M_OUT: M1.2 R10.2 | length 6.5
  Top Layer w0.305: R10.2 -12.7,1.008 v1(-12.7,1.905)
  Bottom Layer w0.508: v1(-12.7,1.905) -10.16,4.445 -10.16,6.147 M1.2
MOTOR_PWM: Q2.2 Q2.4 R11.2 U3.B15 | length 23.3
  Top Layer w0.102: U3.B15 4.947,5.418 5.799,5.418 v1(5.842,5.461)
  Top Layer w0.203: R11.2 -9.679,-0.451 -9.047,0.181 -9.047,0.605 v1(-9.017,0.635)
  Top Layer w0.305: Q2.2 -11.273,-1.845 -10.721,-1.845 -10.603,-1.726 -10.603,-0.575 ; Q2.4 -10.603,-0.575 ; R11.2 -9.903,-0.575 -10.603,-0.575
  Bottom Layer w0.203: v1(-9.017,0.635) -8.458,1.194 -6.793,2.859 3.627,2.859 5.842,5.075 v1(5.842,5.461)
NetQ1_5: Q1.5 Q1.6 Q1.7 Q1.8 | length 4.4
  Top Layer w0.305: Q1.5 -8.099,-7.921 -8.099,-8.361 -7.92,-8.54 -7.491,-8.54 ; Q1.6 -7.495,-8.536 -7.491,-8.54 ; Q1.7 -6.845,-8.529 -6.856,-8.54 ; Q1.8 -6.243,-7.923 -6.243,-8.361 -6.421,-8.54 -6.856,-8.54 ; -7.491,-8.54 -6.856,-8.54
P0_7: U3.A34
P1_2: U3.A27
P1_4: U3.A26
P1_5: U3.A28
P1_6: U3.B12
P1_7: U3.A25
P3_4: U3.A9
P3_6: U3.A22
P4_0: U3.A24
P4_1: U3.B16
P4_2: U3.B17
P4_3: U3.A31
P4_4: U3.A32
PI_NETWORK: C16.2 L2.2 U3.B20 | length 4
  Top Layer w0.312: U3.B20 3.025,9.174 3.429,9.578 C16.2 4.119,10.315 L2.2
PROT_V-: R7.1 U5.6 | length 1.6
  Top Layer w0.203: R7.1 -8.045,-1.8 -7.797,-2.048 -7.797,-2.103 U5.6
QSPI_CLK: U3.B1 U4.6 | length 16
  Top Layer w0.102: v1(-12.573,5.461) -11.205,5.461 -11.176,5.49 U4.6 ; v1(-1.397,7.366) -0.543,6.512 -0.035,6.512 0.168,6.309 0.206,6.309 U3.B1
  Signal Layer 2 w0.102: v1(-12.573,5.461) -5.08,5.461 -3.175,7.366 v1(-1.397,7.366)
QSPI_CS: R1.1 U3.A5 U4.1 | length 8.8
  Top Layer w0.102: U4.1 -5.898,2.95 -5.68,2.95 -5.506,3.124 -5.506,3.13 v1(-5.08,3.556) ; v1(-1.143,5.315) -0.968,5.14 U3.A5
  Top Layer w0.203: U4.1@-5.898,2.95 -5.775,2.827 R1.1
  Signal Layer 2 w0.102: v1(-5.08,3.556) -3.321,5.315 v1(-1.143,5.315)
QSPI_IO0: U3.A2 U4.5 | length 16.2
  Top Layer w0.102: v1(-12.573,6.731) -11.205,6.731 -11.176,6.76 U4.5 ; v1(-1.016,8.509) -0.991,8.484 -0.991,7.408 -0.442,6.859 -0.344,6.859 U3.A2
  Signal Layer 2 w0.102: v1(-12.573,6.731) -4.953,6.731 -3.175,8.509 v1(-1.016,8.509)
QSPI_IO1: U3.A3 U4.2 | length 6.9
  Top Layer w0.102: U4.2 -5.68,4.22 -5.08,4.82 v1(-5.08,4.868) ; v1(-1.387,6.612) -1.32,6.545 -1.016,6.545 -0.711,6.24 U3.A3
  Signal Layer 2 w0.102: v1(-5.08,4.868) -3.335,6.612 v1(-1.387,6.612)
QSPI_IO2: U3.A1 U4.3 | length 7.3
  Top Layer w0.102: U4.3 -5.68,5.49 -5.506,5.664 -5.506,5.67 v1(-5.08,6.096) ; v1(-0.449,8.001) -0.449,7.913 -0.275,7.738 U3.A1
  Signal Layer 2 w0.102: v1(-5.08,6.096) -3.175,8.001 v1(-0.449,8.001)
QSPI_IO3: U3.A4 U4.7 | length 15
  Top Layer w0.102: v1(-12.573,4.191) -11.205,4.191 -11.176,4.22 U4.7 ; v1(-1.143,5.969) -1.101,5.969 -0.822,5.69 U3.A4
  Signal Layer 2 w0.102: v1(-12.573,4.191) -5.08,4.191 -3.302,5.969 v1(-1.143,5.969)
RST: R3.2 RST.1 U3.A21 | length 13.5
  Top Layer w0.152: v1(7.112,-7.112) RST.1@8.25,-8.25
  Top Layer w0.203: U3.A21 5.69,2.39 6.373,1.707 6.373,0.142 R3.2
  Signal Layer 2 w0.203: v1(6.325,1.1) 6.325,-6.325 v1(7.112,-7.112)
SOCP: Q1.1 R2.2 R7.2 R8.2 U3.A18 | length 21.6
  Top Layer w0.203: v1(4.125,1.378) U3.A18
  Top Layer w0.381: Q1.1 -5.713,-5.075
  Top Layer w0.508: R7.2 v1(-4.095,-0.4) -3.3,-1.195 -3.3,-4.476 -3.899,-5.075 R2.2 -5.713,-5.075
  Signal Layer 1 w0.203: v1(-4.095,-0.4) -2.6,-0.4 -0.168,2.032 3.47,2.032 v1(4.125,1.378)
SWDCLK: CLK.1 U3.A14 | length 10.2
  Top Layer w0.152: v1(1.925,0.845) 1.891,0.879 1.891,1.806 U3.A14 ; v1(7.239,-4.175) 7.239,-4.271 8.25,-5.282 CLK.1
  Signal Layer 1 w0.152: v1(1.925,0.845) 2.219,0.845 v1(7.239,-4.175)
SWDIO: IO.1 U3.B8 | length 12.3
  Top Layer w0.102: U3.B8 2.753,2.112 2.753,1.657 3.139,1.27 v1(3.35,1.27)
  Top Layer w0.152: v1(10.033,-4.175) 10.101,-4.243 10.101,-4.35 11,-5.249 IO.1
  Signal Layer 1 w0.152: v1(3.35,1.27) 8.795,-4.175 v1(10.033,-4.175)
UART_RX: RX.1 U3.A35 | length 7.1
  Top Layer w0.102: RX.1 -3.025,12.265 -2.238,11.478 -2.234,11.478 1.375,7.869 U3.A35
UART_TX: TX.1 U3.B23 | length 10
  Top Layer w0.102: TX.1 -4.4,11.275 -2.318,11.275 1.1,7.857 1.1,7.065 U3.B23
USB_N: U3.A17
USB_P: U3.A16
VBAT: "BAT1 +.1" C4.1 C6.1 pad.2@5.5,-8.25 R6.1 U3.A13 U3.B6 | length 31.7
  Top Layer w0.203: U3.B6 U3.A13 1.375,1.397
  Top Layer w0.381: v1(-4.191,-1.301) -4.167,-1.325 -4.167,-2.003 R6.1 ; v1(-0.381,-0.762) -0.357,-0.738 -0.357,-0.167 C4.1 C6.1 ; C6.1@1.04,-0.145 C6.1 ; 1.36,1.382 1.36,0.075 1.2,-0.085 C6.1
  Bottom Layer w0.635: -9.064,-7 -9.064,-3.984 -6.381,-1.301 v1(-4.191,-1.301) -0.92,-1.301 ; v1(-0.381,-0.762) -0.92,-1.301 ; v1(5.5,-8.25) 0.55,-8.25 -1.349,-6.351 -1.349,-2.592 -0.92,-2.163 -0.92,-1.301
VBUS: C3.1 C15.1 R12.2 U3.B7 | length 18.5
  Top Layer w0.102: U3.B7 1.994,2.321 2.079,2.321 2.2,2.2 2.2,1.375
  Top Layer w0.203: 2.185,1.573 2.185,1.231 2.382,1.034 2.382,0.107 2.667,0.107 C3.1
  Top Layer w0.254: v1(1.778,-0.762) 1.778,-0.682 2.375,-0.085 C3.1 ; v1(7.032,-9.488) 7.769,-10.225 R12.2@7.875,-10.225
  Top Layer w0.381: R12.2@7.641,-9.941 R12.2 9.525,-10.175 C15.1
  Bottom Layer w0.254: v1(1.778,-0.762) 1.778,-2.727 7.032,-7.981 v1(7.032,-9.488)
VBUS_IN: D1.2 P1.1 R12.1 | length 4.7
  Top Layer w0.203: P1.1@5.67,-12.925 6.323,-12.272 6.323,-12.131 D1.2
  Top Layer w0.635: P1.1@6.323,-12.131 6.483,-11.971 7.779,-11.971 R12.1
XL_INT_1: U2.11 U3.A12 | length 13.2
  Top Layer w0.102: v1(0.41,1.1) 0.825,1.515 U3.A12
  Top Layer w0.152: v1(10.668,-2.159) 10.672,-2.155 10.672,-1.443 U2.11
  Bottom Layer w0.152: v1(0.41,1.1) 0.506,1.1 0.625,0.982 0.669,0.982 3.81,-2.159 v1(10.668,-2.159)
XL_INT_2: U2.9 | length 12.2
  Top Layer w0.203: v1(9.144,-1.397) 9.632,-1.397 U2.9
  Bottom Layer w0.203: -1.016,2.159 4.504,2.159 8.06,-1.397 v1(9.144,-1.397)
pads on no net: U2.2 U2.3 U2.13 U2.15 U2.16 U5.1

## Polygon pours and split planes (outlines as drawn)
GND on Signal Layer 1 "INNER1-GND" (solid, remove dead copper, shelved, pour order 24): -6.875,-15 cw(c0,0) -6.875,15 6.875,15 cw(c0,0) 6.875,-15
GND on Signal Layer 2 "INNER2_GND" (solid, remove dead copper, shelved, pour order 26): -6.875,-15 cw(c0,0) -6.875,15 6.875,15 cw(c0,0) 6.875,-15
3V3 on Bottom Layer "BOTTOM_3V3" (solid, remove dead copper, shelved, pour order 25): -6.875,-15 cw(c0,0) -6.875,15 6.875,15 cw(c0,0) 6.875,-15
GND on Top Layer "TOP_GND" (solid, remove dead copper, shelved, pour order 23): -6.875,-15 cw(c0,0) -6.875,15 6.875,15 cw(c0,0) 6.875,-15

## Keep-outs
Keep-Out Layer:
  circle w0.05: c-9.5,11 r1.75
  circle w0.05: c-0.275,-12.925 r1.75
  lines w0.025: -6.875,-15 cw(c0,0) -6.875,15 6.875,15 cw(c0,0) 6.875,-15 -6.875,-15

## Other copper
Top Layer:
  pour cut-out: 6.545,11.581 5.402,12.724 2.481,9.803 3.624,8.66
Signal Layer 1:
  pour cut-out: 6.545,11.581 5.402,12.724 2.481,9.803 3.624,8.66

## Silkscreen, mask and mechanical layers (free items; w line width, h text height)
Top Overlay:
  circle w0.2: c-0.825,-5.95 r0.075
  lines w0.025: 8.925,-1.925 8.925,-1.925
  text "GND" at -8.25,8.8 h0.75
  text "VREF" at 3.653,-6.95 h0.75
  text "GND" at 12.446,-7.626 h0.75
Bottom Overlay:
  drawing of 548 lines, arcs and shapes, not listed
  text "OpenWatch" at 5.842,11.327 h1
  text "2020 - Danny Grob" at 7.425,10.16 h1
  text "Based on SmarchWatch by Samson March" at 12.1,7.975 h1
  text "GND" at 1.778,-11.275 h0.75
  text "VBUS" at 8.525,-11.275 h0.75
Mechanical 1:
  circle w0.1: c0,0 r0.237
  circle w0.1: c0,0 r16.17
  text "ACTIVE AREA" at -3,11.5 h1
  text "DISPLAY CENTER" at -1.85,0.3 h1